# Altium PCB FxxZx.PcbDoc (part 1 of 2)
Units mil, origin at the board's own origin, x right, y up, seen from the top; angles counter-clockwise.
Board outline 1968 x 1968 mil, 4 copper layers (Top Layer, Gnd Layer, Vcc Layer, Bottom Layer), stack 30.635 mil thick; 55 components, 130 nets, 443 pads, 464 vias.
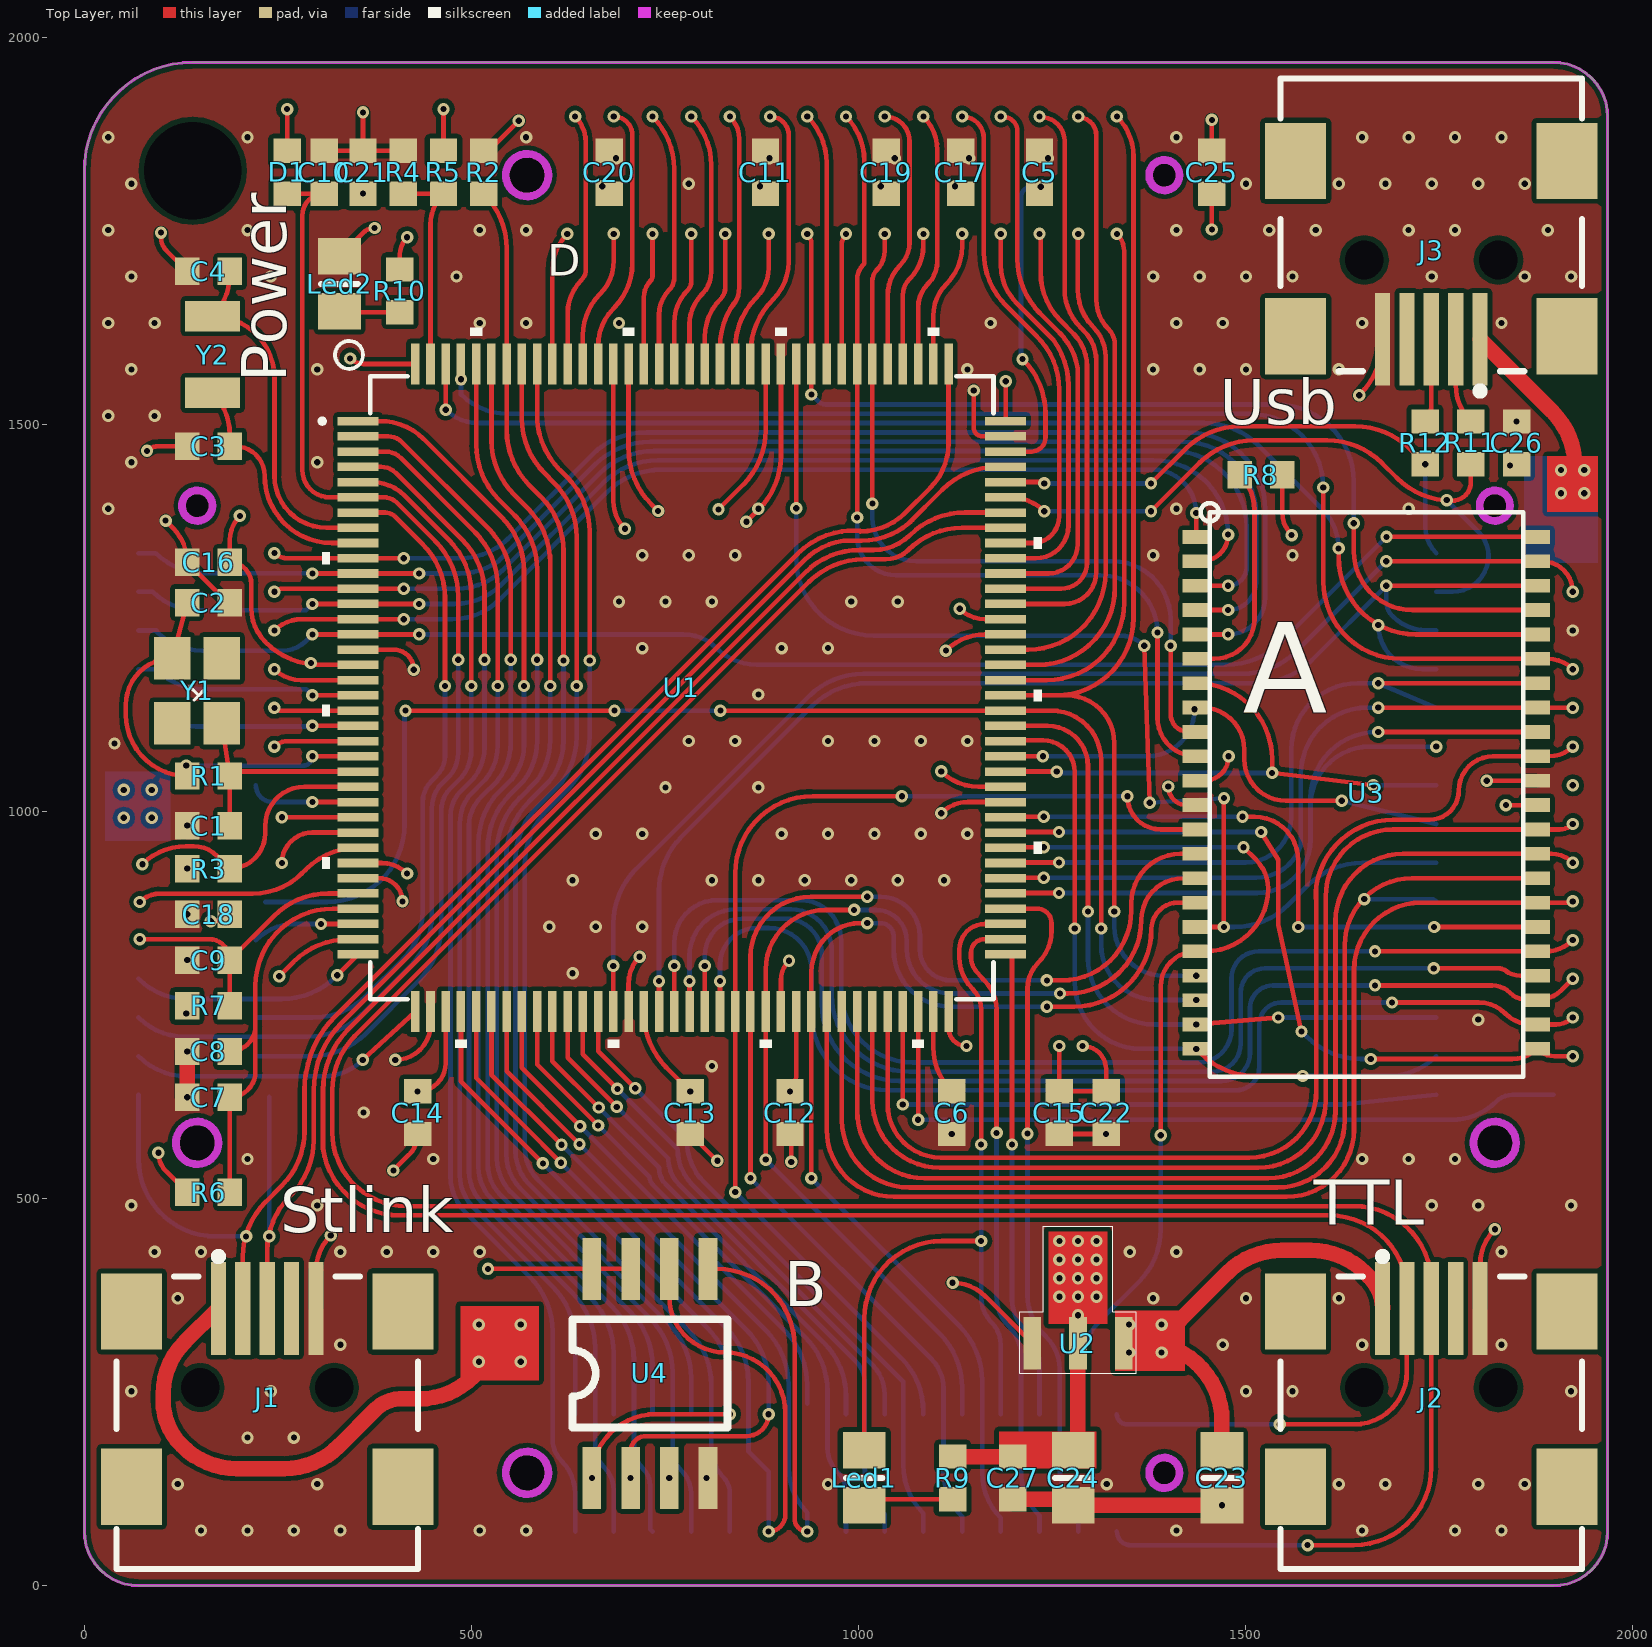
[diagram p0: Top Layer view]
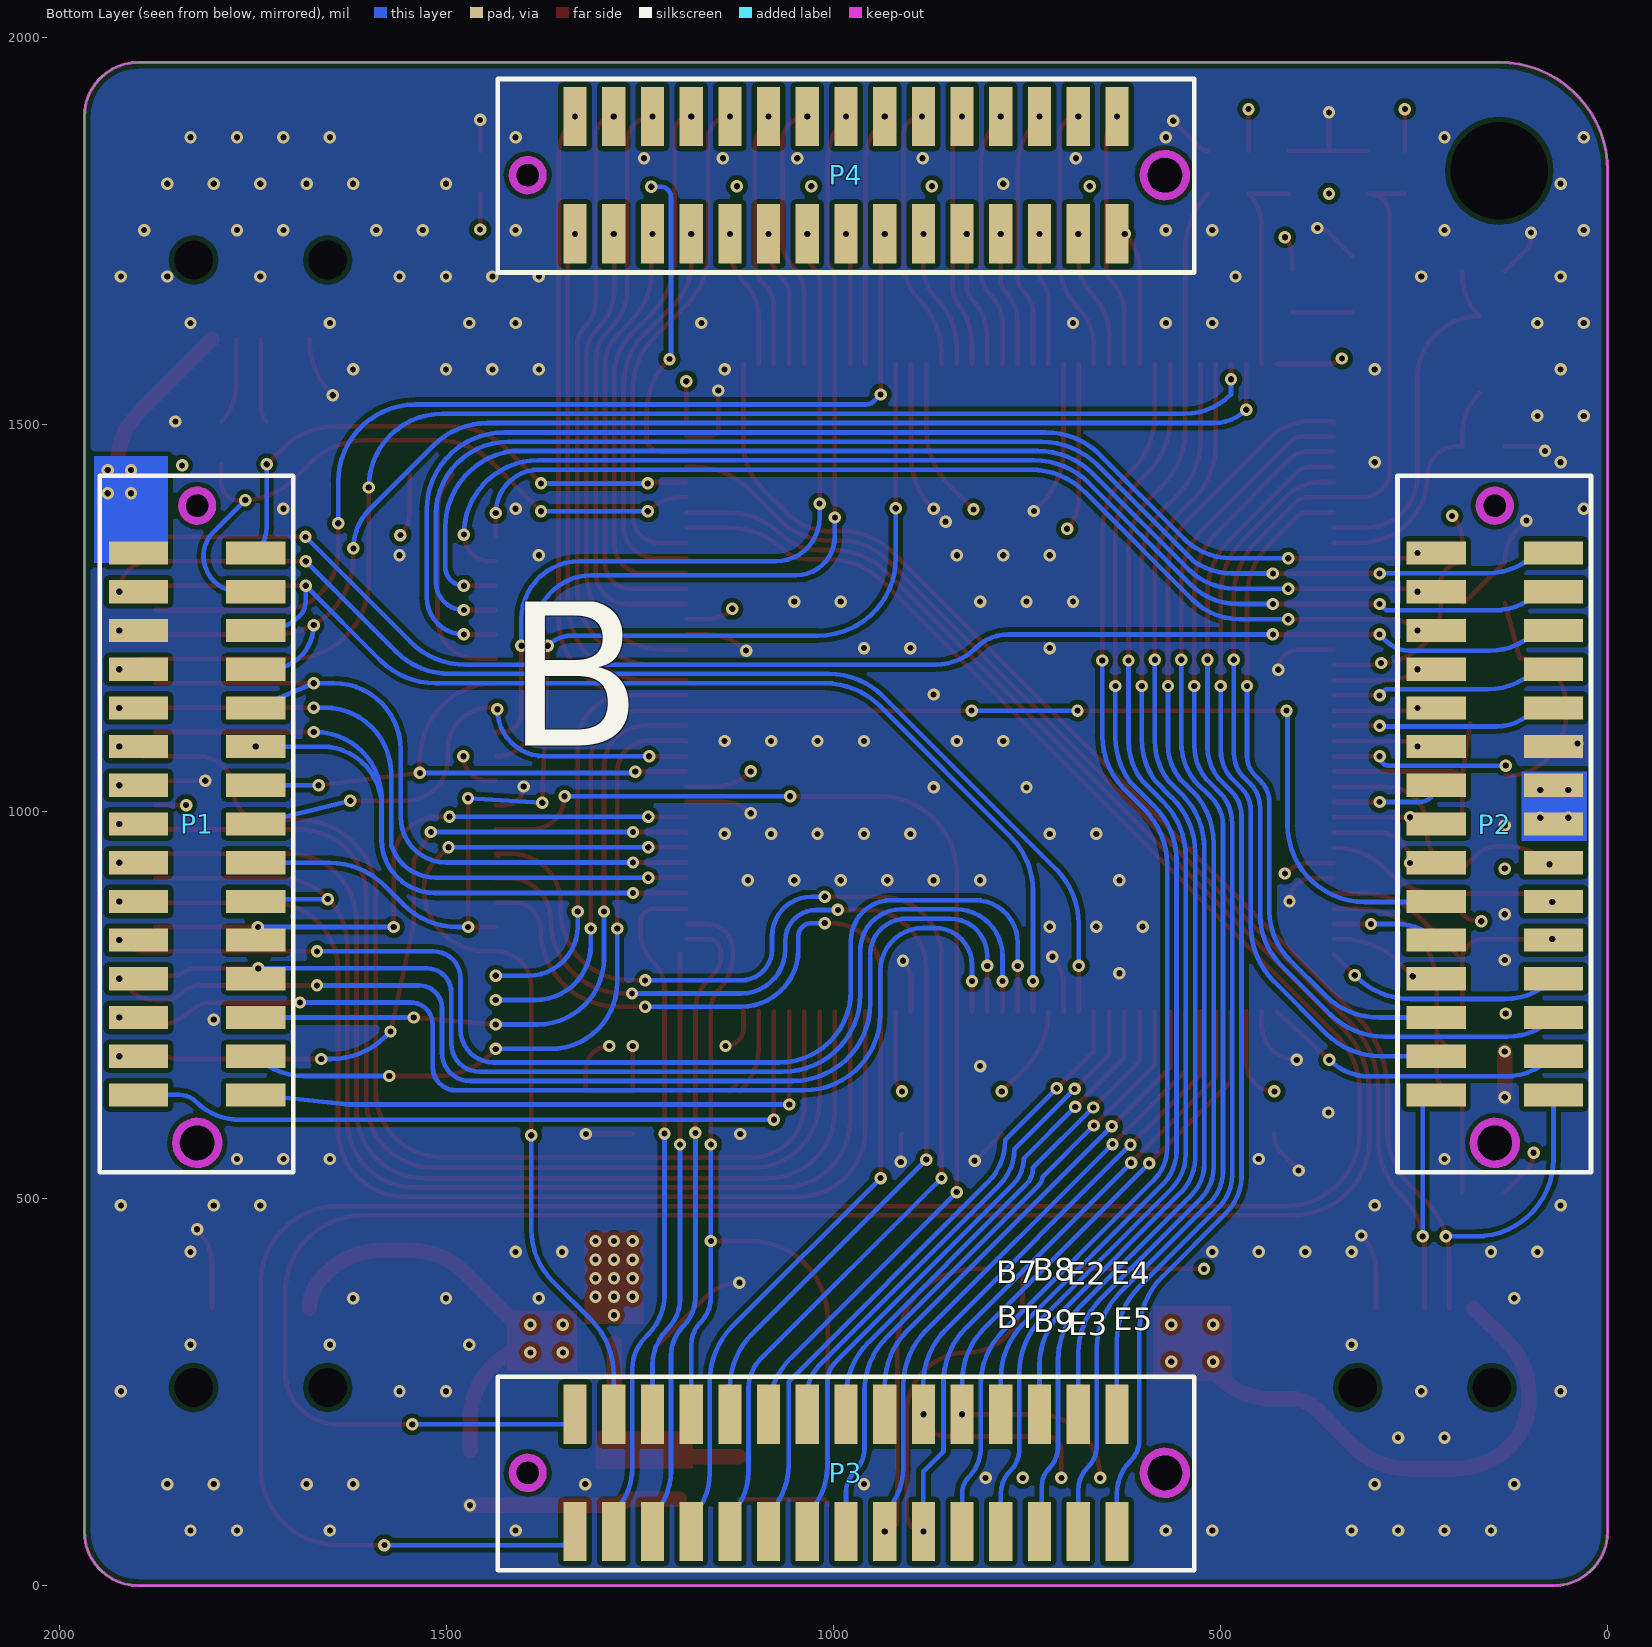
[diagram p1: Bottom Layer view, seen from below]
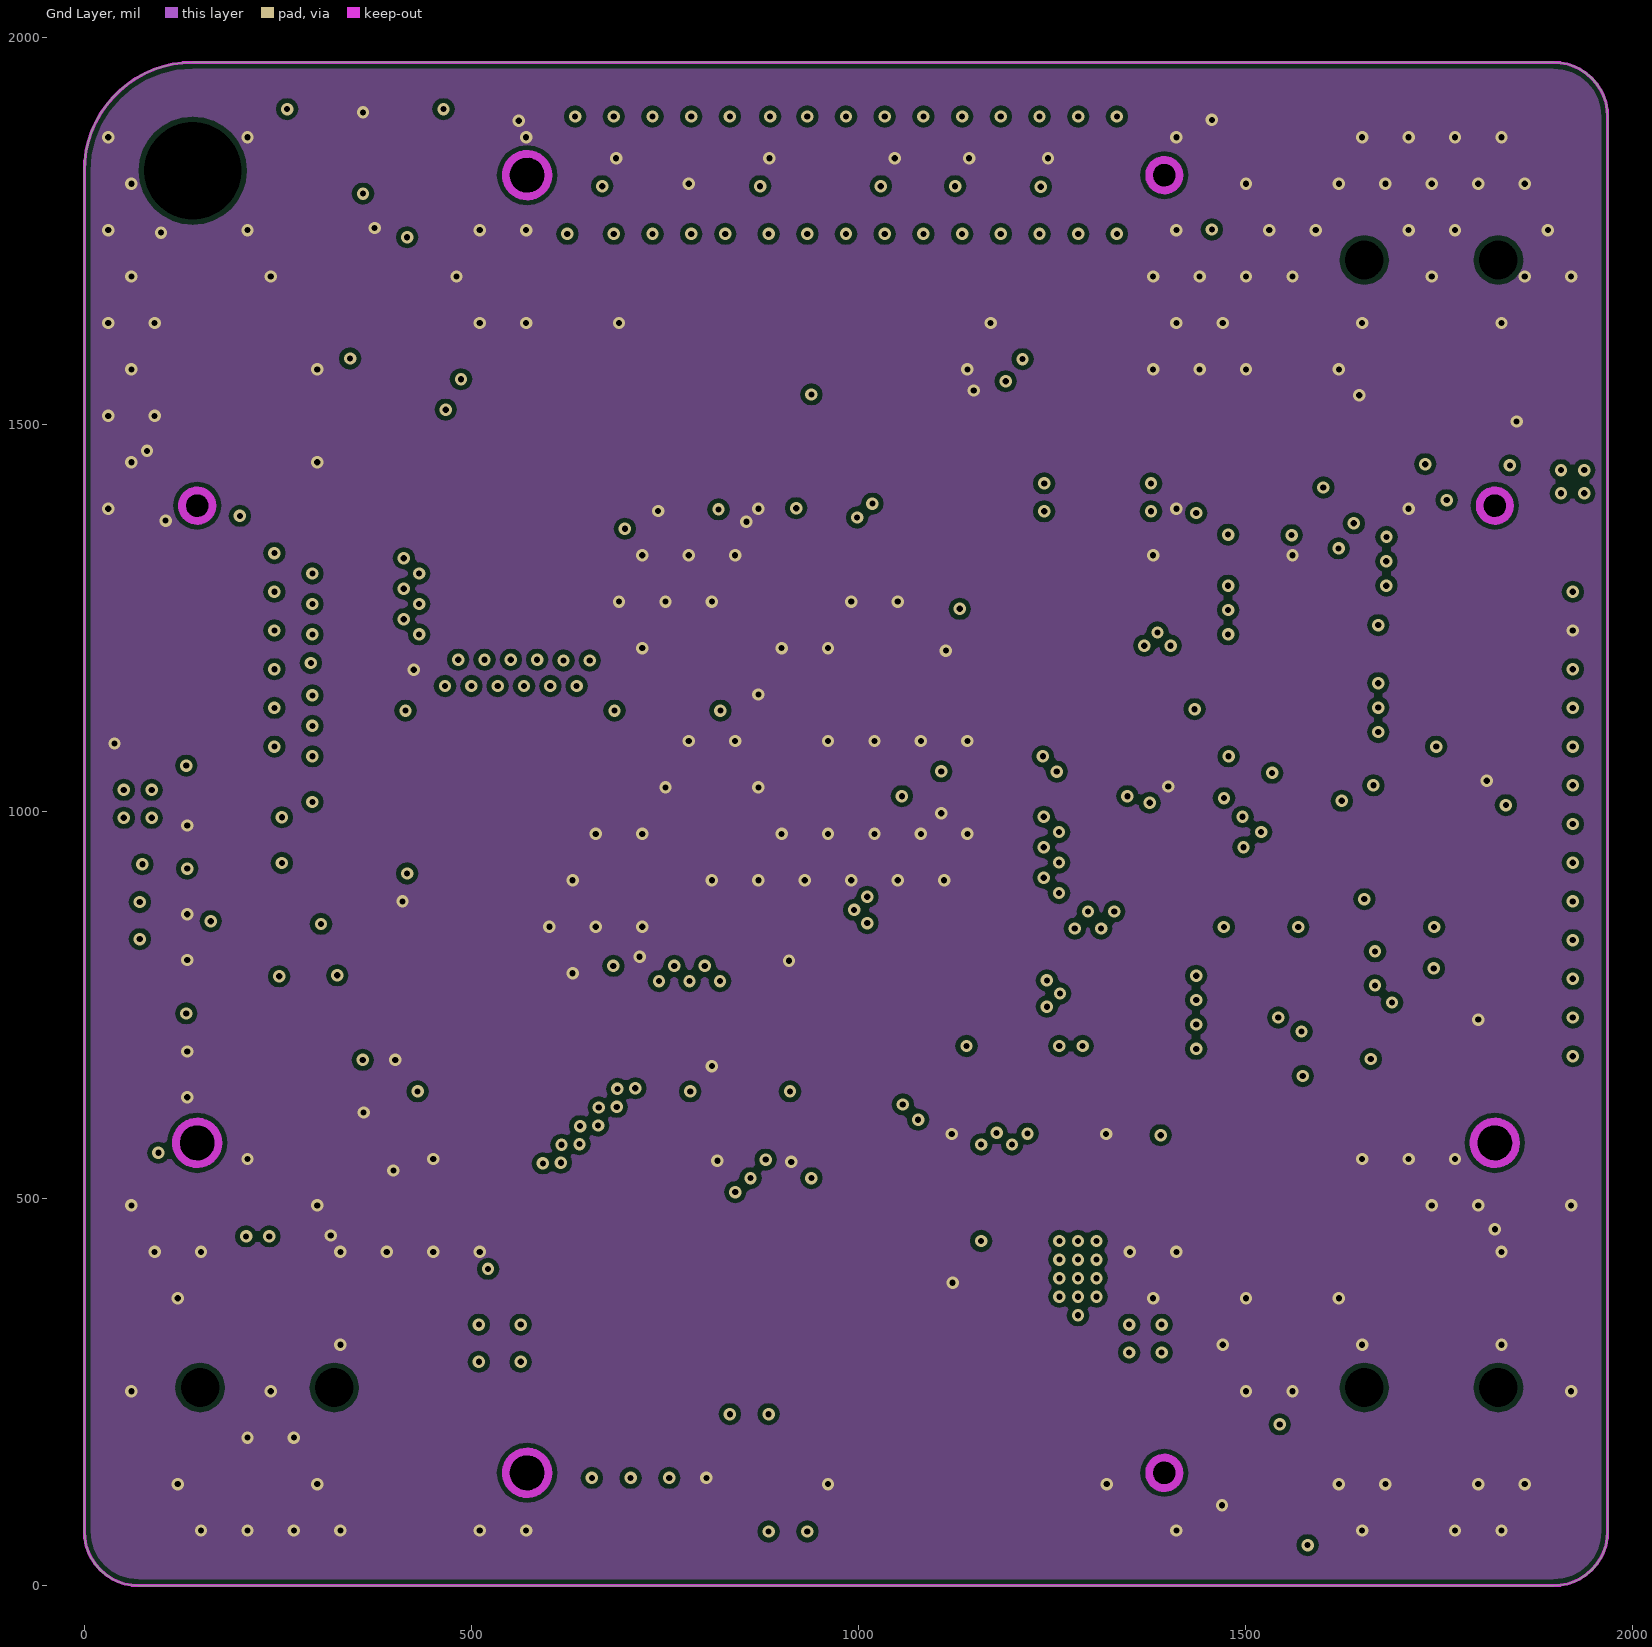
[diagram p2: Gnd Layer]
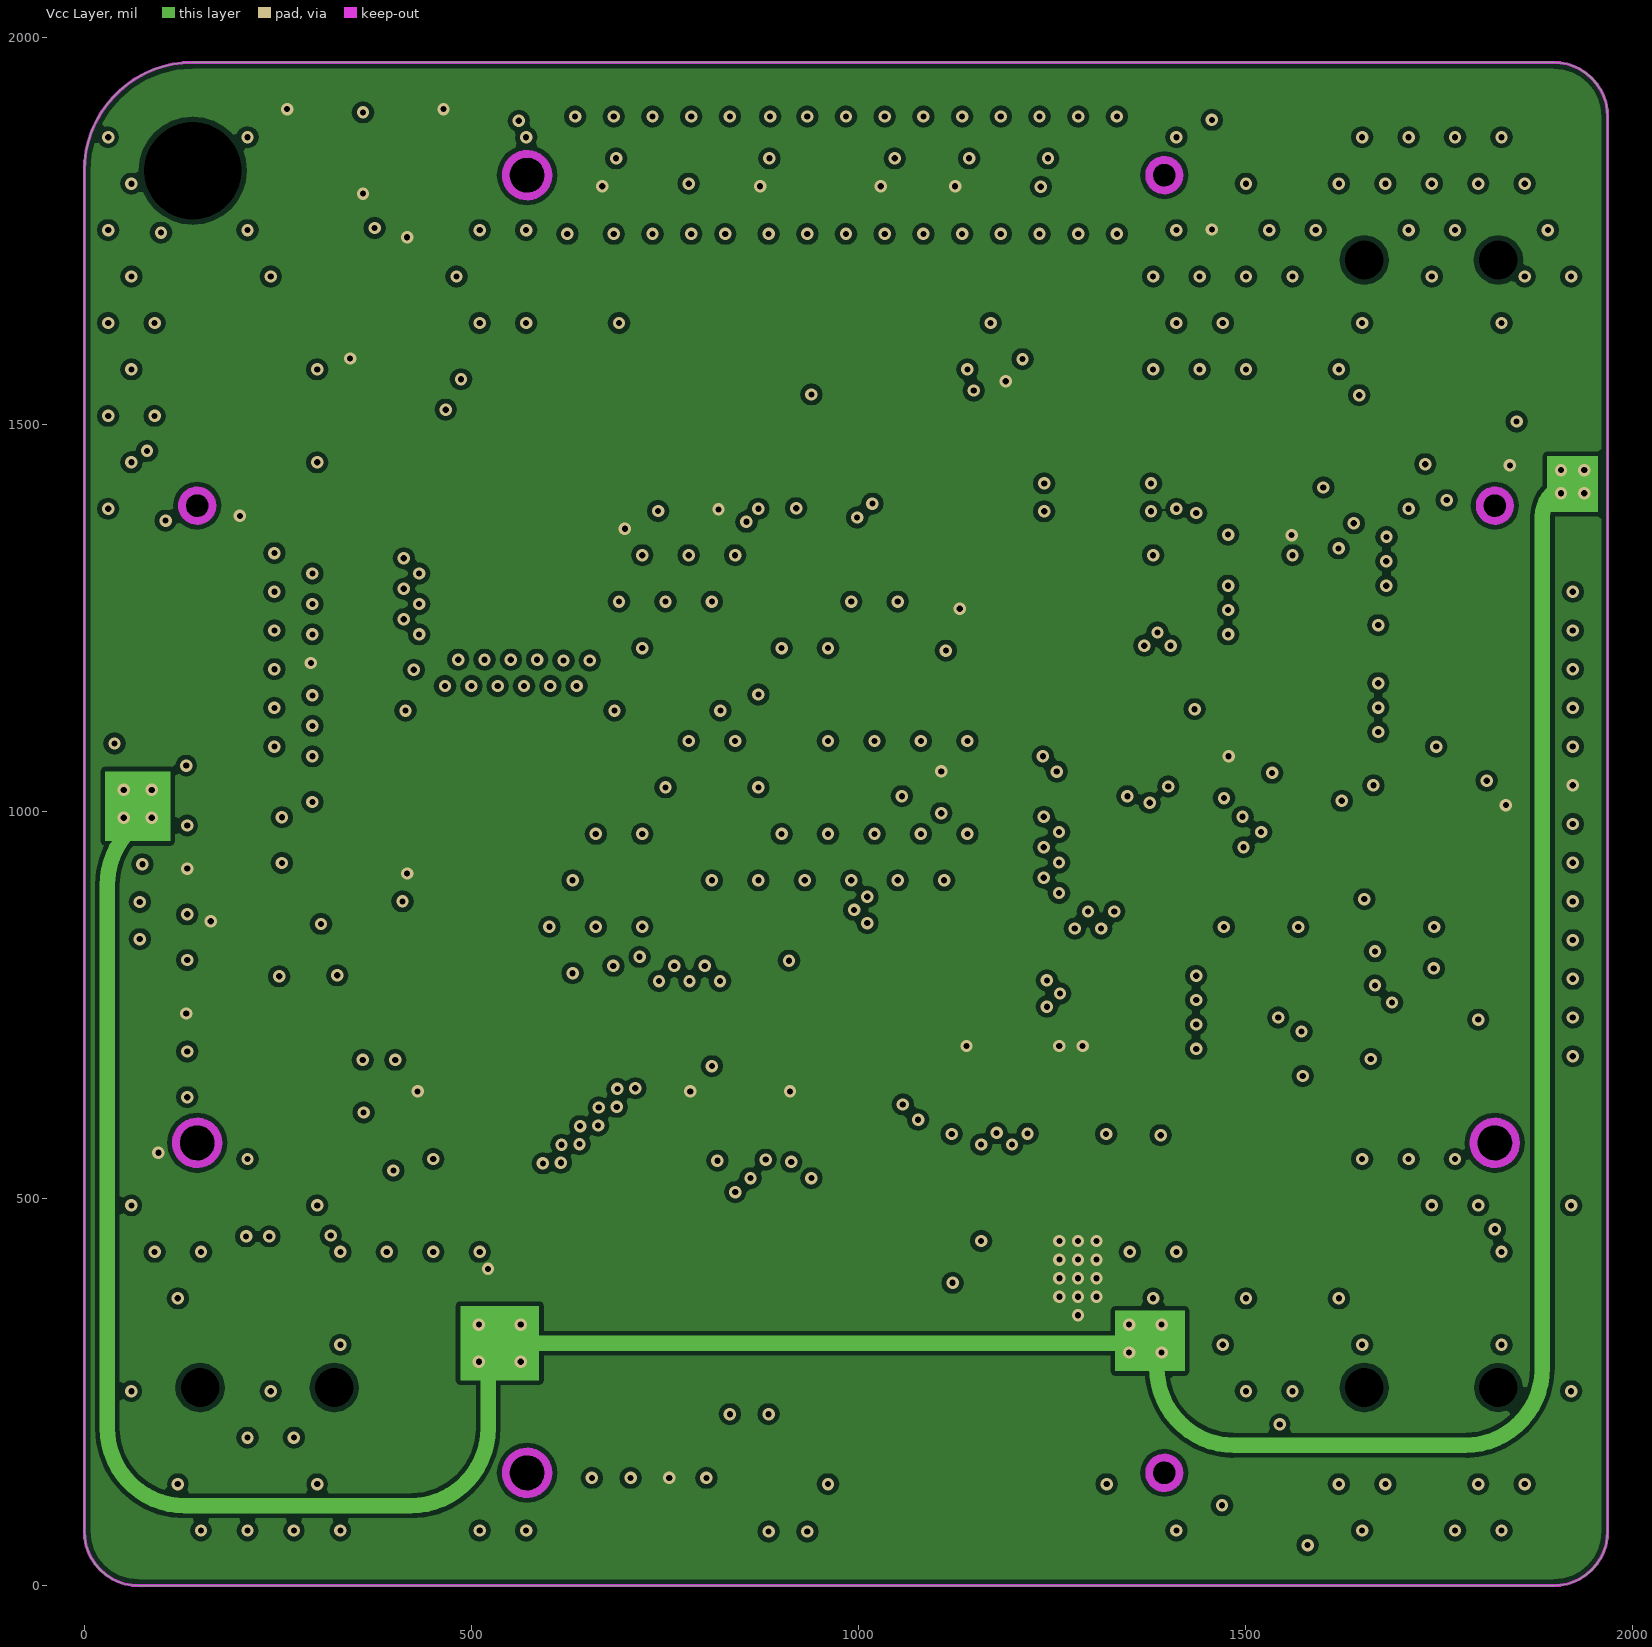
[diagram p3: Vcc Layer]

## Layer stack, top to bottom
Top Solder: solder mask 0.4, Solder Resist, Dk 3.5
Top Layer: signal copper 1.4
Dielectric 1: core 10, FR-4, Dk 4.2
Gnd Layer: signal copper 1.4173
Dielectric 2: prepreg 5, Dk 4.2
Vcc Layer: signal copper 1.4173
Dielectric 3: core 10, Dk 4.2
Bottom Layer: signal copper 1.4
Bottom Solder: solder mask 0.4, Solder Resist, Dk 3.5

## Board outline
0,70 ccw(c70,70) 70,0 1898,0 ccw(c1898,70) 1968,70 1968,1898 ccw(c1898,1898) 1898,1968 140,1968 ccw(c140,1828) 0,1828

## Design rules (kind name [scope] priority, off if disabled: settings)
Clearance [All] p1: gap=6 ignorepadtopadclearanceinfootprint=FALSE
HoleSize [All] p1: absolutevalues=TRUE maxlimit=99999 minlimit=8 maxpercent=80.000 minpercent=20.000
MinimumSolderMaskSliver [All] p1: minsoldermaskwidth=0
PolygonConnect [All] p1: connectstyle=Direct reliefconductorwidth=10 reliefentries=4 polygonreliefangle="90 Angle" airgapwidth=10
RoutingVias [All] p1: holewidth=8 width=16 viastyle="Through Hole" minholewidth=8 minwidth=16 maxholewidth=28 maxwidth=50
SilkToSilkClearance [All] p1: silktosilkclearance=0
SilkToSolderMaskClearance [IsPad] p1: minsilkscreentomaskgap=0 clearancetoexposedcopper=TRUE
SolderMaskExpansion [All] p1: expansion=4
Width [All] p1: maxlimit=10000 minlimit=6 preferedwidth=6
26 further rules are at their usual default settings.

## Components (designator, comment, footprint, x,y, rotation, side; value= is the part's Value field where it differs from the comment)
C1 "22p" 0603 160.44,982 r0 top
C2 "22p" 0603 160.44,1270 r180 top
C3 "15p" 0603 160.44,1472 r0 top
C4 "15p" 0603 160.44,1698 r0 top
C5 "2.2u" 0603 1234,1825.97 r270 top
C6 "2.2u" 0603 1120.52,611.05 r90 top
C7 "10u" 0603 160.44,631.07 r0 top
C8 "104" 0603 160.44,690.13 r0 top
C9 "104" 0603 160.44,808.24 r0 top
C10 "104" 0603 310,1826 r270 top
C11 "104" 0603 880,1825.97 r270 top
C12 "104" 0603 911.69,611.05 r90 top
C13 "104" 0603 782.73,611.05 r90 top
C14 "104" 0603 430.53,611.05 r90 top
C15 "104" 0603 1259.52,611.05 r90 top
C16 "104" 0603 160.44,1322 r0 top
C17 "104" 0603 1132,1825.97 r270 top
C18 "104" 0603 160.44,867.29 r0 top
C19 "104" 0603 1036,1825.97 r270 top
C20 "104" 0603 678,1825.98 r270 top
C21 "104" 0603 360,1826 r270 top
C22 "104" 0603 1320,611.05 r90 top
C23 "10u" 0805 1469.69,139.25 r90 top
C24 "10u" 0805 1277.69,139.25 r90 top
C25 "104" 0603 1456.69,1826 r270 top
C26 "104" 0603 1850.39,1476.38 r270 top
C27 "104" 0603 1199.69,139.25 r90 top
D1 "1N4148" 0603 262,1826 r270 top
J1 "MicroUSB" USB/SM0.8-6H5 236.22,49.21 r270 top
J2 "MicroUSB" USB/SM0.8-6H5 1740.16,49.21 r270 top
J3 "MicroUSB" USB/SM0.8-6H5 1740.16,1919.29 r90 top
Led1 "Red" 0805 1007.69,139.25 r90 top
Led2 "Red" 0805 329.69,1681.82 r90 top
P1 "XH1.27A" XH1.27A 1898,634 r180 bottom locked
P2 "XH1.27A" XH1.27A 221.6,634 r180 bottom locked
P3 "XH1.27A" XH1.27A 634,70 r90 bottom locked
P4 "XH1.27A" XH1.27A 634,1746.4 r90 bottom locked
R1 "1M" 0603 160.44,1046 r180 top
R2 "50k" 0603 516,1826 r270 top
R3 "10k" 0603 160.44,926.35 r0 top
R4 "0" 0603 412,1826 r270 top
R5 "0" 0603 464,1826 r270 top
R6 "10" 0603 160.44,508 r0 top
R7 "x" 0603 160.44,749.18 r180 top
R8 "10k" 0603 1520.13,1435.25 r0 top
R9 "1k" 0603 1121.69,139.25 r90 top
R10 "1k" 0603 407.69,1672.81 r90 top
R11 "10R" 0603 1791.34,1476.38 r270 top
R12 "10R" 0603 1732.28,1476.38 r270 top
U1 "STM32F4xxZ1" LQFP144-20x20mm 772,1160 r0 top locked value=Value
U2 "AMS1117" SOT-89 1283.69,279.2 r0 top
U3 "IS62WV51216" tsop-44 1453.81,657.64 r0 top locked
U4 "W25Q64" SOIC-8 655.69,139.25 r90 top
Y1 "25M" 3225-4 202.65,1085 r90 top
Y2 "32.768" 3215-2 165.65,1541 r90 top

## Footprints (in the part's own frame and the unit in brackets; to place one, negate y for a bottom-side part, rotate by r counter-clockwise, add the part's x,y. Pads: shape width x height; smd on the part's side, far side on the other; paste and mask are expansions set on the pad)
0603 [mm] "Chip Capacitor, Body 1.6x0.8mm, IPC High Density"
  rect 0.8x0.9 smd: 1(-0.7,0) 2(0.7,0)
  body extent -0.87,-0.48 0.87,0.48, height 1.3
0805 [mm] "Chip Resistor, Body 2.0x1.2mm, IPC Medium Density"
  rect 1.2x1.4 smd: 1(-0.9,0) 2(0.9,0)
  silkscreen extent 0,-0.6 0,0.6, body extent -1.07,-0.7 1.07,0.7, height 0.7
3215-2 [mm] "XTAL"
  rect 1x1.8 smd: 1(0,0) 2(2.515,0)
3225-4 [mm] "XTAL"
  rect 1.4x1.2 smd: 1(0.737,0.635) 2(2.87,0.635) 3(2.87,2.261) 4(0.737,2.261)
  silkscreen extent 1.5,1.24 1.96,1.7
LQFP144-20x20mm [mm]
  rect 1.346x0.28 smd: 1(-10.625,8.75) 2(-10.625,8.25) 3(-10.625,7.75) 4(-10.625,7.25) 5(-10.625,6.75) 6(-10.625,6.25) 7(-10.625,5.75) 8(-10.625,5.25) 9(-10.625,4.75) 10(-10.625,4.25) 11(-10.625,3.75) 12(-10.625,3.25) 13(-10.625,2.75) 14(-10.625,2.25) 15(-10.625,1.75) 16(-10.625,1.25) 17(-10.625,0.75) 18(-10.625,0.25) 19(-10.625,-0.25) 20(-10.625,-0.75) 21(-10.625,-1.25) 22(-10.625,-1.75) 23(-10.625,-2.25) 24(-10.625,-2.75) 25(-10.625,-3.25) 26(-10.625,-3.75) 27(-10.625,-4.25) 28(-10.625,-4.75) 29(-10.625,-5.25) 30(-10.625,-5.75) 31(-10.625,-6.25) 32(-10.625,-6.75) 33(-10.625,-7.25) 34(-10.625,-7.75) 35(-10.625,-8.25) 36(-10.625,-8.75) 73(10.625,-8.75) 74(10.625,-8.25) 75(10.625,-7.75) 76(10.625,-7.25) 77(10.625,-6.75) 78(10.625,-6.25) 79(10.625,-5.75) 80(10.625,-5.25) 81(10.625,-4.75) 82(10.625,-4.25) 83(10.625,-3.75) 84(10.625,-3.25) 85(10.625,-2.75) 86(10.625,-2.25) 87(10.625,-1.75) 88(10.625,-1.25) 89(10.625,-0.75) 90(10.625,-0.25) 91(10.625,0.25) 92(10.625,0.75) 93(10.625,1.25) 94(10.625,1.75) 95(10.625,2.25) 96(10.625,2.75) 97(10.625,3.25) 98(10.625,3.75) 99(10.625,4.25) 100(10.625,4.75) 101(10.625,5.25) 102(10.625,5.75) 103(10.625,6.25) 104(10.625,6.75) 105(10.625,7.25) 106(10.625,7.75) 107(10.625,8.25) 108(10.625,8.75)
  rect 0.28x1.346 smd: 37(-8.75,-10.625) 38(-8.25,-10.625) 39(-7.75,-10.625) 40(-7.25,-10.625) 41(-6.75,-10.625) 42(-6.25,-10.625) 43(-5.75,-10.625) 44(-5.25,-10.625) 45(-4.75,-10.625) 46(-4.25,-10.625) 47(-3.75,-10.625) 48(-3.25,-10.625) 49(-2.75,-10.625) 50(-2.25,-10.625) 51(-1.75,-10.625) 52(-1.25,-10.625) 53(-0.75,-10.625) 54(-0.25,-10.625) 55(0.25,-10.625) 56(0.75,-10.625) 57(1.25,-10.625) 58(1.75,-10.625) 59(2.25,-10.625) 60(2.75,-10.625) 61(3.25,-10.625) 62(3.75,-10.625) 63(4.25,-10.625) 64(4.75,-10.625) 65(5.25,-10.625) 66(5.75,-10.625) 67(6.25,-10.625) 68(6.75,-10.625) 69(7.25,-10.625) 70(7.75,-10.625) 71(8.25,-10.625) 72(8.75,-10.625) 109(8.75,10.625) 110(8.25,10.625) 111(7.75,10.625) 112(7.25,10.625) 113(6.75,10.625) 114(6.25,10.625) 115(5.75,10.625) 116(5.25,10.625) 117(4.75,10.625) 118(4.25,10.625) 119(3.75,10.625) 120(3.25,10.625) 121(2.75,10.625) 122(2.25,10.625) 123(1.75,10.625) 124(1.25,10.625) 125(0.75,10.625) 126(0.25,10.625) 127(-0.25,10.625) 128(-0.75,10.625) 129(-1.25,10.625) 130(-1.75,10.625) 131(-2.25,10.625) 132(-2.75,10.625) 133(-3.25,10.625) 134(-3.75,10.625) 135(-4.25,10.625) 136(-4.75,10.625) 137(-5.25,10.625) 138(-5.75,10.625) 139(-6.25,10.625) 140(-6.75,10.625) 141(-7.25,10.625) 142(-7.75,10.625) 143(-8.25,10.625) 144(-8.75,10.625)
  silkscreen extent -11.88,-11.81 11.81,11.81, body extent -10.95,-10.95 10.95,10.95, height 1.6
SOIC-8 [mil]
  rect 80x24 smd: 1(0,0) 2(0,-50.06) 3(0,-100.06) 4(0,-150.06) 5(270,-150) 6(270,-100) 7(270,-50) 8(270,0)
  silkscreen extent 65,-175 205,25
SOT-89 [mm]
  rect 0.58x1.73 smd: 1(-1.5,0.865) 2(0,0.865) 3(1.5,0.865)
  Top Layer region: -0.967,1.5 0.967,1.5 0.967,4.53 -0.967,4.53
  silkscreen extent -1.91,-0.13 1.91,4.7
tsop-44 [mm]
  rect 0.885x0.45 smd: 1(-0.443,17.71) 2(-0.443,16.91) 3(-0.443,16.11) 4(-0.443,15.31) 5(-0.443,14.51) 6(-0.443,13.71) 7(-0.443,12.91) 8(-0.443,12.11) 9(-0.443,11.31) 10(-0.443,10.51) 11(-0.443,9.71) 12(-0.443,8.91) 13(-0.443,8.11) 14(-0.443,7.31) 15(-0.443,6.51) 16(-0.443,5.71) 17(-0.443,4.91) 18(-0.443,4.11) 19(-0.443,3.31) 20(-0.443,2.51) 21(-0.443,1.71) 22(-0.443,0.91) 23(10.733,0.91) 24(10.733,1.71) 25(10.733,2.51) 26(10.733,3.31) 27(10.733,4.11) 28(10.733,4.91) 29(10.733,5.71) 30(10.733,6.51) 31(10.733,7.31) 32(10.733,8.11) 33(10.733,8.91) 34(10.733,9.71) 35(10.733,10.51) 36(10.733,11.31) 37(10.733,12.11) 38(10.733,12.91) 39(10.733,13.71) 40(10.733,14.51) 41(10.733,15.31) 42(10.733,16.11) 43(10.733,16.91) 44(10.733,17.71)
  silkscreen extent -0.3,0 10.29,18.82
USB/SM0.8-6H5 [mm]
  rect 3.048x0.5 smd: 1(-7.85,-1.6) 2(-7.85,-0.8) 3(-7.85,0) 4(-7.85,0.8) 5(-7.85,1.6)
  round 0.6 hole 1.27 unplated: MH1(-5.25,2.2) MH2(-5.25,-2.2)
  rect 2.5x2 smd: ""(-7.75,4.45) ""(-7.75,-4.45) ""(-1.996,4.45) ""(-1.996,-4.45)
  silkscreen extent -9.67,-4.95 0.7,4.95
XH1.27A [mm]
  rect 1.95x0.76 smd: 1(0,17.78) 2(0,16.51) 3(0,15.24) 4(0,13.97) 5(0,12.7) 6(0,11.43) 7(0,10.16) 8(0,8.89) 9(0,7.62) 10(0,6.35) 11(0,5.08) 12(0,3.81) 13(0,2.54) 14(0,1.27) 15(0,0) 16(3.85,0) 17(3.85,1.27) 18(3.85,2.54) 19(3.85,3.81) 20(3.85,5.08) 21(3.85,6.35) 22(3.85,7.62) 23(3.85,8.89) 24(3.85,10.16) 25(3.85,11.43) 26(3.85,12.7) 27(3.85,13.97) 28(3.85,15.24) 29(3.85,16.51) 30(3.85,17.78)
  Keep-Out Layer circle w0.254: c1.925,19.335 r0.5
  Keep-Out Layer circle w0.254: c1.925,-1.575 r0.7
  Keep-Out Layer board cut-out: 1.225,-1.575 1.278,-1.843 1.43,-2.07 1.657,-2.222 1.925,-2.275 1.925,-2.275 2.193,-2.222 2.42,-2.07 2.572,-1.843 2.625,-1.575 2.625,-1.575 2.572,-1.307 2.42,-1.08 2.193,-0.928 1.925,-0.875 1.925,-0.875 1.657,-0.928 1.43,-1.08 1.278,-1.307 1.225,-1.575
  Keep-Out Layer board cut-out: 1.925,18.835 1.734,18.873 1.571,18.981 1.463,19.144 1.425,19.335 1.425,19.335 1.463,19.526 1.571,19.689 1.734,19.797 1.925,19.835 1.925,19.835 2.116,19.797 2.279,19.689 2.387,19.526 2.425,19.335 2.425,19.335 2.387,19.144 2.279,18.981 2.116,18.873 1.925,18.835
  silkscreen extent -1.27,-2.54 5.08,20.32

## Part data
C1 C2 C3 C4 C5 C6 C7 C8 C9 C10 C11 C12 C13 C14 C15 C16 C17 C18 C19 C20 C21 C22 C23 C24 C25 C26 C27: library part C, "Capacitor", LatestRevisionDate=17-Jul-2002, LatestRevisionNote="Re-released for DXP Platform.", PackageDescription="Radial Cap, Thru-Hole; 2 Leads; 0.3 in Pin Spacing", PackageReference=RAD-0.3, Published=8-Jun-2000, Publisher="Altium Limited"
D1: library part D, "Diode", Code_JEDEC=DO-214-AB, LatestRevisionDate=17-Jul-2002, LatestRevisionNote="Re-released for DXP Platform.", PackageDescription="DO-214-AB/SMC; 2 C-Bend Leads; Body 7.9 x 5.9 mm, inc. leads (LxW)", PackageReference=SMC, PackageVersion=Sep-1996, Published=8-Jun-2000, Publisher="Altium Limited"
Led1 Led2: library part LED, "LED", LatestRevisionDate=08-Jul-2005, LatestRevisionNote="Mech Layer 1 removed.", PackageDescription="LED; 2 Leads", PackageReference=LED-0, Published=8-Jun-2000, Publisher="Altium Limited"
R1 R2 R3 R4 R5 R6 R7 R8 R9 R10 R11 R12: library part R, "Resistor", LatestRevisionDate=17-Jul-2002, LatestRevisionNote="Re-released for DXP Platform.", PackageDescription="Axial Device, Thru-Hole; 2 Leads; 0.4 in Pin Spacing", PackageReference=AXIAL-0.4, Published=8-Jun-2000, Publisher="Altium Limited"
U1: "Imported", Manufacturer_Part_Number=stm32f4xxz1, C="Copyright (C) 2016 Accelerated Designs. All rights reserved", Copyright="Copyright (C) 2016 Accelerated Designs. All rights reserved", RefDes=RefDes, Type=Type, Vendor=STMicroelectronics
U4: library part W25X16, "W25X16;SST25VF016;MX25L1605"
Y1 Y2: library part XTAL, "Crystal Oscillator", LatestRevisionDate=17-Jul-2002, LatestRevisionNote="Re-released for DXP Platform.", Published=8-Jun-2000, Publisher="Altium Limited"

## Free pads (board coordinates)
  round 3.2 hole 125.98: 19(140,1828)

## Via types
v1: diameter 16, hole 8, Top Layer to Bottom Layer, 464 vias

## Nets (pads, with @x,y where several pads share a name; then routed paths per layer and width w, separated by ;. In a path a pad name is that pad's centre, name@x,y a point inside that pad or via, vN(x,y) a via of type N, cw(c..) or ccw(c..) an arc to the next point about the centre after c; other vN are vias at no path point)
A0: P2.11 U1.34 | length 137.7
  Top Layer w6: v1(305.69,854.88) U1.34@353.69,854.88
  Bottom Layer w6: P2.11@221.6,834 cw(c272.01,783.59) 272.01,854.88 v1(305.69,854.88)
A1: P2.12 U1.35 | length 117.6
  Top Layer w6: v1(251.69,787.25) 270.35,805.91 cw(c341.06,735.2) 341.06,835.2 U1.35@353.69,835.2
A2: P2.19 U1.36 | length 310.2
  Top Layer w6: v1(326.7,788.51) U1.36@353.69,815.51
  Bottom Layer w6: P2.19@70.03,784 ccw(c132.89,846.86) 132.89,757.96 254.72,757.96 ccw(c254.72,857.96) 325.43,787.25 v1(326.7,788.51)
A3: P2.17 U1.37 | length 394.5
  Top Layer w6: v1(359.69,679.25) U1.37@427.51,741.69
  Bottom Layer w6: P2.17@70.03,684 ccw(c132.89,746.86) 132.89,657.96 308.29,657.96 ccw(c308.29,730.65) v1(359.69,679.25)
A4: P3.20 U1.40 U4.1 | length 885
  Top Layer w6: U1.40@486.57,741.69 486.57,651.48 555.54,582.51 v1(592.46,545.59) ; v1(655.69,139.25) cw(c738.02,139.25) 738.02,221.57 v1(834,221.57)
  Bottom Layer w6: v1(592.46,545.59) 804.71,333.34 cw(c734,262.63) 834,262.63 v1(834,221.57)
A5: P3.10 U1.41 U4.6 | length 1261.1
  Top Layer w6: U1.41@506.25,741.69 506.25,655.84 567.57,594.53 v1(615.65,546.44) ; U4.6@755.69,409.25 755.69,373.25 ccw(c827.69,373.25) 827.69,301.25 cw(c827.69,223.25) 905.69,223.25 905.69,91.69 cw(c884,91.69) v1(884,70)
  Bottom Layer w6: v1(615.65,546.44) 828.67,333.42 cw(c757.96,262.71) 857.96,262.71 857.96,173.46 884,147.43 v1(884,70)
A6: P3.21 U1.42 U4.2 | length 904
  Top Layer w6: U1.42@525.94,741.69 525.94,660.2 v1(616.5,569.63) ; v1(705.76,139.25) 705.76,173.32 cw(c725.69,173.32) 725.69,193.25 855.68,193.25 ccw(c855.68,221.57) v1(884,221.57)
  Bottom Layer w6: v1(616.5,569.63) 854.71,331.42 cw(c784,260.71) 884,260.71 v1(884,221.57)
A7: P3.9 U1.43 U4.5 | length 1242.4
  Top Layer w6: U1.43@545.62,741.69 545.62,664.55 v1(639.69,570.48) ; U4.5@805.69,409.25 817.69,409.25 cw(c817.69,309.25) 917.69,309.25 917.69,86.31 ccw(c934,86.31) v1(934,70)
  Bottom Layer w6: v1(639.69,570.48) 880.75,329.43 cw(c810.04,258.71) 910.04,258.71 910.04,152.26 ccw(c991.85,152.26) 934,94.42 v1(934,70)
A8: P4.26 U1.100 | length 653.3
  Top Layer w6: v1(1134,1897.97) cw(c1134,1869.97) 1162,1869.97 1162,1722.58 ccw(c1258.65,1722.58) 1190.31,1654.24 1231.22,1613.33 ; U1.100@1190.31,1347.01 1225.02,1347.01 ccw(c1225.02,1381.36) 1259.38,1381.36 1259.38,1545.35 ccw(c1163.24,1545.35) 1231.26,1613.29 ; 1231.26,1613.29 ccw(c1163.24,1545.35) 1231.22,1613.33
A9: J2.3 P3.1 U1.101 | length 3477.2
  Top Layer w6: 1064.46,1337.97 cw(c1035.44,1367.06) 1035.44,1325.97 1006.71,1325.97 ccw(c1006.71,1225.97) 936,1296.68 349.67,710.35 ccw(c420.38,639.64) 320.38,639.64 320.38,585.97 ccw(c415.99,585.97) 415.99,490.36 1640.16,490.36 cw(c1640.16,390.36) 1740.16,390.36 J2.3@1740.16,358.27 1740.16,152.36 cw(c1640.16,152.36) 1640.16,52.36 v1(1580.38,52.36) ; 1064.49,1338.01 cw(c1133.8,1268.63) 1133.8,1366.69 U1.101@1190.31,1366.69
  Bottom Layer w6: P3.1@1334,70 ccw(c1351.64,70) 1351.64,52.36 v1(1580.38,52.36)
A10: J2.2 P3.30 U1.102 | length 3304.2
  Top Layer w6: 308.05,566.86 ccw(c407.39,578.36) 308.38,564.33 ; 1066.47,1357.22 cw(c1020,1403.7) 1020,1337.97 1001.74,1337.97 ccw(c1001.74,1237.97) 931.03,1308.68 341.18,718.83 ccw(c420.38,639.64) 308.38,639.64 308.38,564.34 ; 1066.61,1357.09 cw(c1137.32,1286.38) 1137.32,1386.38 U1.102@1190.31,1386.38 ; v1(1544.38,208.36) 1640.38,208.36 ccw(c1640.38,276.64) 1708.66,276.64 J2.2@1708.66,358.27 1708.66,378.36 ccw(c1608.66,378.36) 1608.66,478.36 407.39,478.36 cw(c407.39,578.36) 308.38,564.33
  Bottom Layer w6: P3.30@1334,221.57 ccw(c1347.21,221.57) 1347.21,208.36 v1(1544.38,208.36)
A11: P1.29 R11.2 U1.103 | length 886
  Top Layer w6: U1.103@1190.31,1406.06 1196.33,1406.06 cw(c1196.33,1344.31) v1(1240,1387.97) ; v1(1378,1387.97) 1440.43,1450.4 cw(c1511.14,1379.69) 1511.14,1479.69 1605.7,1479.69 cw(c1605.7,1379.69) 1676.41,1450.4 1695.83,1430.98 ccw(c1766.54,1501.69) v1@1766.54,1401.69 ; v1@1767.12,1401.69 ccw(c1767.12,1425.91) 1791.34,1425.91 R11.2@1791.34,1448.82
  Bottom Layer w6: v1(1240,1387.97) v1(1378,1387.97) ; P1.29@1746.43,1284 1767.61,1284 ccw(c1767.61,1330.43) 1814.05,1330.43 ccw(c1770.59,1330.43) 1801.32,1361.16 v1(1760.05,1402.43)
A12: P1.30 R12.2 U1.104 | length 703.2
  Top Layer w6: U1.104@1190.31,1425.75 1235.72,1425.75 cw(c1235.72,1419.69) v1(1240,1423.97) ; v1(1378,1423.97) 1422.43,1468.4 cw(c1493.14,1397.69) 1493.14,1497.69 1641.99,1497.69 cw(c1641.99,1397.69) 1712.7,1468.4 v1(1732.28,1448.82)
  Bottom Layer w6: v1(1240,1423.97) v1(1378,1423.97) ; v1(1732.28,1448.82) 1732.28,1368.14 ccw(c1780.57,1368.14) P1.30@1746.43,1334
A15: P4.5 U1.110 | length 178
  Top Layer w6: U1.110@1096.8,1578.31 1096.8,1640.46 cw(c1155.52,1640.46) 1114,1681.97 ccw(c1065.72,1730.26) 1134,1730.26 v1(1134,1746.4)
B0: P3.23 U1.46 | length 671.6
  Top Layer w6: U1.46@604.68,741.69 604.68,677.62 v1(664.59,617.71)
  Bottom Layer w6: v1(664.59,617.71) 742.48,539.82 ccw(c773.57,539.82) 751.58,517.84 954.71,314.71 cw(c884,244) 984,244 P3.23@984,221.57
B1: P3.7 U1.47 | length 836.9
  Top Layer w6: U1.47@624.36,741.69 624.36,681.98 649.65,656.69 v1(687.77,618.57)
  Bottom Layer w6: v1(687.77,618.57) 754.48,551.86 754.48,548.92 ; 754.39,551.86 ccw(c802.19,551.86) 754.48,548.92 ; P3.7@1034,70 1034,92.42 cw(c1096.86,155.28) 1007.96,155.28 1007.96,263.42 ccw(c971.56,263.42) 997.3,289.15 768.39,518.06 cw(c802.19,551.86) 754.48,548.92
B2: P3.24 U1.48 | length 676.5
  Top Layer w6: U1.48@644.05,741.69 644.05,686.34 v1(688.63,641.76)
  Bottom Layer w6: v1(688.63,641.76) 766.48,563.9 ccw(c831.57,563.9) 785.51,517.91 ; 785.54,517.88 1018.01,285.42 ; 1018.04,285.39 cw(c979.4,246.81) 1034,246.81 P3.24@1034,221.57
B3: P4.14 U1.133 | length 178.8
  Top Layer w6: U1.133@644.05,1578.31 644.05,1615.4 cw(c719,1615.4) 666,1668.4 ccw(c622.54,1711.86) 684,1711.86 v1(684,1746.4)
B4: P4.16 U1.134 | length 329.7
  Top Layer w6: U1.134@624.36,1578.31 624.36,1643.82 cw(c684.58,1643.82) 642,1686.4 ccw(c627.51,1700.89) 648,1700.89 648,1864.18 ccw(c600.2,1864.18) v1(634,1897.97)
B5: P4.15 U1.135 | length 173.3
  Top Layer w6: U1.135@604.68,1578.31 604.68,1699.75 cw(c670.65,1699.75) v1(624,1746.4)
B6: P3.11 U1.136 | length 1653.4
  Top Layer w6: U1.136@584.99,1578.31 584.99,1512.15 ccw(c684.99,1512.15) 585.97,1498.18 ccw(c684.99,1512.15) 614.28,1441.44 623.7,1432.02 cw(c552.99,1361.31) 652.99,1361.31 v1(652.99,1195.25)
  Bottom Layer w6: v1(652.99,1195.25) 652.99,1098.67 cw(c552.99,1098.67) 625.02,1029.3 598.28,1002.54 ccw(c668.99,931.83) 568.99,931.83 568.99,566.42 ccw(c629.75,566.42) 586.79,523.46 780.75,329.49 cw(c710.04,258.78) 810.04,258.78 810.04,177.28 ccw(c862.17,177.28) 810.14,174.09 ccw(c862.17,177.28) 825.31,140.42 cw(c804.32,119.43) 834,119.43 P3.11@834,70
B7: P3.19 U1.137 | length 1489.2
  Top Layer w6: U1.137@565.31,1578.31 565.31,1507.84 ccw(c665.31,1507.84) 594.6,1437.13 606.7,1425.02 cw(c535.99,1354.31) 635.99,1354.31 v1(635.99,1162.25)
  Bottom Layer w6: 616.08,1037.32 ccw(c537.03,1096.85) 616.17,1037.43 ; v1(635.99,1162.25) 635.99,1096.85 cw(c537.03,1096.85) 616.17,1037.43 ; P3.19@784,221.57 784,267.85 ccw(c684,267.85) 754.71,338.56 574.86,518.42 cw(c617.98,561.54) 556.99,561.54 556.99,936.83 cw(c656.99,936.83) 586.28,1007.54 616.17,1037.43
B8: P3.18 U1.139 | length 1476.8
  Top Layer w6: U1.139@525.94,1578.31 525.94,1480.21 ccw(c625.94,1480.21) 555.23,1409.5 572.7,1392.02 cw(c501.99,1321.31) 601.99,1321.31 v1(601.99,1162.25)
  Bottom Layer w6: 551.31,508.03 704.71,354.62 cw(c634,283.91) 734,283.91 P3.18@734,221.57 ; 551.28,508.05 cw(c595.52,552.24) 532.99,552.24 532.99,946.83 cw(c632.99,946.83) 562.28,1017.54 584.52,1039.78 ; 584.44,1039.67 ccw(c512.76,1092.81) 584.52,1039.78 ; v1(601.99,1162.25) 601.99,1092.81 cw(c512.76,1092.81) 584.52,1039.78
B9: P3.13 U1.140 | length 1629.7
  Top Layer w6: U1.140@506.25,1578.31 506.25,1473.89 ccw(c606.25,1473.89) 535.54,1403.18 555.7,1383.02 cw(c484.99,1312.31) 584.99,1312.31 v1(584.99,1196.25)
  Bottom Layer w6: 568.11,1040.34 ccw(c498.53,1091.67) 568.19,1040.45 ; v1(584.99,1196.25) 584.99,1091.67 cw(c498.53,1091.67) 568.19,1040.45 ; P3.13@734,70 730.99,73.01 730.99,129.45 ccw(c701.34,129.45) 722.31,150.42 cw(c751.92,180.03) 710.52,173.71 cw(c751.92,180.03) 710.04,180.03 710.04,290.9 ccw(c610.04,290.9) 680.75,361.61 538,504.37 cw(c579.05,545.42) 520.99,545.42 520.99,951.83 cw(c620.99,951.83) 550.28,1022.54 568.19,1040.45
B10: P1.16 U1.69 | length 809.6
  Top Layer w6: v1(1057.43,621.69) U1.69@1057.43,741.69
  Bottom Layer w6: v1(1057.43,621.69) 1626.43,621.69 1659.86,625.12 P1.16@1746.43,634
B11: P1.15 U1.70 | length 969.2
  Top Layer w6: v1(1077.12,601.97) U1.70@1077.12,741.69
  Bottom Layer w6: v1(1077.12,601.97) 1767.49,601.97 ccw(c1767.49,681.45) 1787.79,604.61 ccw(c1767.49,681.45) 1823.69,625.25 cw(c1844.81,604.13) 1844.81,634 P1.15@1898,634
B12: P3.28 U1.73 | length 603.9
  Top Layer w6: v1(1198.52,569.97) U1.73@1198.52,815.97
  Bottom Layer w6: v1(1198.52,569.97) 1198.52,370.31 ccw(c1253.2,370.31) 1214.54,331.65 cw(c1167.54,284.65) 1234,284.65 P3.28@1234,221.57
B13: P3.3 U1.74 | length 827.3
  Top Layer w6: v1(1178.52,584.97) 1178.52,744.21 ccw(c1126.11,744.21) 1163.17,781.27 1160.85,783.59 ccw(c1102.06,739.55) 1154,791.49 cw(c1174.49,811.97) 1145.52,811.97 1145.52,817.97 cw(c1162.74,817.97) 1162.74,835.2 U1.74@1190.31,835.2
  Bottom Layer w6: v1(1178.52,584.97) 1178.52,373.36 ccw(c1233.25,373.36) 1194.55,334.66 cw(c1157.16,297.27) 1210.04,297.27 1210.04,148.26 ccw(c1291.85,148.26) 1234,90.42 P3.3@1234,70
B14: Led1.2 P3.27 U1.75 | length 1071.7
  Top Layer w6: Led1.2@1007.69,174.69 1007.69,345.25 cw(c1107.69,345.25) 1107.69,445.25 v1(1158.52,445.25) ; v1(1158.52,569.97) 1158.52,744.42 ccw(c1120.96,744.42) 1147.52,770.97 cw(c1188.56,812.01) 1130.52,812.01 1130.52,821.97 cw(c1163.43,821.97) 1163.43,854.88 U1.75@1190.31,854.88
  Bottom Layer w6: v1(1158.52,569.97) v1(1158.52,445.25) 1158.52,372.53 ccw(c1203.94,372.53) 1171.82,340.42 cw(c1142.42,311.02) 1184,311.02 P3.27@1184,221.57
B15: P3.2 U1.76 | length 882
  Top Layer w6: U1.76@1190.31,874.57 1230.92,874.57 cw(c1230.92,855.97) 1249.52,855.97 1249.52,846.01 cw(c1191.48,846.01) 1232.52,804.97 ccw(c1266.32,771.17) 1218.52,771.17 v1(1218.52,584.01)
  Bottom Layer w6: v1(1218.52,584.01) 1218.52,376.09 ccw(c1291.98,376.09) 1240,324.18 ; 1240.04,324.15 1242.76,321.42 ; 1242.8,321.38 cw(c1201.06,279.71) 1260.04,279.71 1260.04,152.26 ccw(c1341.85,152.26) 1284,94.42 P3.2@1284,70
Boot0: P3.12 R2.2 U1.138 | length 1869.7
  Top Layer w6: R2.2@516,1798.44 516.33,1798.11 cw(c445.62,1727.4) 545.62,1727.4 U1.138@545.62,1578.31 545.62,1492.52 ccw(c645.62,1492.52) 574.91,1421.81 589.7,1407.02 cw(c518.99,1336.31) 618.99,1336.31 v1(618.99,1195.25)
  Bottom Layer w6: 600.58,1038.81 ccw(c535.26,1091.2) 600.69,1038.95 ; v1(618.99,1195.25) 618.99,1091.2 cw(c535.26,1091.2) 600.69,1038.95 ; P3.12@784,70 784,119.19 ccw(c744.08,119.19) 778.99,138.55 ccw(c744.08,119.19) 772.31,147.42 cw(c801.92,177.03) 760.14,174.08 cw(c801.92,177.03) 760.04,177.03 760.04,274.84 ccw(c660.04,274.84) 730.75,345.55 563.89,512.42 cw(c609.5,558.03) 544.99,558.03 544.99,941.83 cw(c644.99,941.83) 574.28,1012.54 600.69,1038.95
C0: P2.7 U1.26 | length 144.4
  Top Layer w6: v1(294.64,1012.36) U1.26@353.69,1012.36
  Bottom Layer w6: P2.7@221.6,1034 ccw(c243.24,1034) 243.24,1012.36 v1(294.64,1012.36)
C1: P2.8 U1.27 | length 98.4
  Top Layer w6: v1(255.27,992.68) U1.27@353.69,992.68
C2: P2.9 U1.28 | length 120.9
  Top Layer w6: v1(255.27,933.62) cw(c294.64,933.62) 294.64,972.99 U1.28@353.69,972.99
C3: P2.21 U1.29 | length 301.4
  Top Layer w6: v1(71.69,883.25) cw(c97.66,857.28) 97.66,894.01 217.31,894.01 ccw(c217.31,985.06) 281.68,920.67 286.48,925.47 cw(c353.69,858.26) U1.29@353.69,953.31
C4: P3.22 U1.44 | length 654.7
  Top Layer w6: U1.44@565.31,741.69 565.31,668.91 v1(640.54,593.67)
  Bottom Layer w6: v1(640.54,593.67) 904.71,329.51 cw(c834,258.8) 934,258.8 P3.22@934,235.42
C5: P3.8 U1.45 | length 828.5
  Top Layer w6: U1.45@584.99,741.69 584.99,673.27 v1(663.73,594.53)
  Bottom Layer w6: v1(663.73,594.53) 730.48,527.78 ccw(c744.57,527.78) 734.6,517.83 930.75,321.68 cw(c860.04,250.96) 960.04,250.96 960.04,178.45 ccw(c1005.34,178.45) 960.26,173.97 ccw(c1005.34,178.45) 973.31,146.42 cw(c947.49,120.6) 984,120.6 P3.8@984,70
C6: P4.28 U1.96 | length 757.9
  Top Layer w6: U1.96@1190.31,1268.27 1266.43,1268.27 ccw(c1266.43,1309.21) 1307.38,1309.21 1307.38,1582.42 ccw(c1252.73,1582.42) 1291.37,1621.06 1287.01,1625.42 cw(c1336.83,1675.23) 1266.38,1675.23 1266.38,1866.36 ccw(c1235.38,1866.36) v1@1235.38,1897.36
  other v1: 1234,1897.97
C7: P4.3 U1.97 | length 568.6
  Top Layer w6: U1.97@1190.31,1287.95 1261.97,1287.95 ccw(c1261.97,1321.36) 1295.38,1321.36 1295.38,1575.42 ccw(c1235.83,1575.42) 1277.96,1617.5 1261.31,1634.15 cw(c1323.91,1696.75) 1235.38,1696.75 v1@1235.38,1747.36
  other v1: 1234,1746.4
C8: P4.27 U1.98 | length 701.6
  Top Layer w6: v1@1187.38,1897.36 cw(c1187.38,1879.36) 1205.38,1879.36 1205.38,1714.53 ccw(c1305.38,1714.53) 1234.67,1643.82 1259.79,1618.7 cw(c1200.5,1559.42) 1283.38,1572.11 1283.38,1345.36 cw(c1245.65,1345.36) 1245.65,1307.64 U1.98@1190.31,1307.64
  other v1: 1184,1897.97
C9: P4.4 U1.99 | length 511.4
  Top Layer w6: v1(1184,1746.4) 1184,1705.95 ccw(c1252.63,1705.95) 1204.08,1657.44 ; U1.99@1190.31,1327.32 1229.34,1327.32 ccw(c1229.34,1369.36) 1271.38,1369.36 1271.38,1550.11 ccw(c1171.38,1550.11) 1251.3,1610.22 1204.1,1657.42
C10: P4.25 U1.111 | length 331.1
  Top Layer w6: U1.111@1077.12,1578.31 1077.12,1650.88 cw(c1121.1,1650.88) 1090,1681.97 ccw(c1061.03,1710.95) 1102,1710.95 1102,1854.52 ccw(c1040.54,1854.52) v1(1084,1897.97)
C11: P4.6 U1.112 | length 175.2
  Top Layer w6: U1.112@1057.43,1578.31 1057.43,1667.29 cw(c1086.68,1667.29) 1066,1687.97 ccw(c1022.54,1731.43) 1084,1731.43 v1(1084,1746.4)
C12: P4.24 U1.113 | length 345.5
  Top Layer w6: v1(1034,1897.97) cw(c1034,1865.97) 1066,1865.97 1066,1734.95 cw(c1025.03,1734.95) 1054,1705.97 ccw(c1093.24,1666.74) 1037.75,1666.74 U1.113@1037.75,1578.31
C13: P2.13 U1.7 | length 875.9
  Top Layer w6: U1.7@353.69,1386.38 388.68,1386.38 cw(c388.68,1367.86) 401.76,1380.96 436.7,1346.02 cw(c365.99,1275.31) 465.99,1275.31 v1(465.99,1162.25)
  Bottom Layer w6: P2.13@221.6,734 295.02,734 ccw(c295.02,834) 365.73,763.29 411.04,808.6 ccw(c348.39,871.25) 436.99,871.25 436.99,1011.65 cw(c477.08,1011.65) 448.73,1039.99 455.23,1046.49 ccw(c429.26,1072.47) 465.99,1072.47 v1(465.99,1162.25)
D0: P4.7 U1.114 U3.9 | length 999.7
  Top Layer w6: v1(1018.06,1397.97) U1.114@1018.06,1578.31 1018.06,1685.64 cw(c1038.33,1685.64) 1024,1699.97 ccw(c999.86,1724.12) 1034,1724.12 v1(1034,1746.4) ; v1(1403.38,1214.36) 1403.38,1126.22 ccw(c1426.68,1126.22) 1426.68,1102.91 U3.9@1436.37,1102.91
  Bottom Layer w6: v1@1018.52,1397.97 ccw(c1019.62,1396.87) 1018.06,1396.87 1018.06,1379.97 ccw(c1074.62,1379.97) 1074.62,1323.42 1328.32,1323.42 cw(c1328.32,1248.36) 1403.38,1248.36 v1(1403.38,1214.36)
D1: P4.23 U1.115 U3.10 | length 1198.7
  Top Layer w6: v1(984,1897.97) cw(c926.61,1840.58) 1007.77,1840.58 1007.77,1710.25 cw(c1001.72,1710.25) 1006,1705.97 ccw(c1024.4,1687.57) 998.38,1687.57 U1.115@998.38,1578.31 v1(998.38,1379.97) ; v1(1386.38,1231.36) 1386.38,1121.41 ccw(c1436.37,1121.41) U3.10@1436.37,1071.42
  Bottom Layer w6: v1(998.38,1379.97) 998.38,1355.56 ccw(c1048.52,1355.56) 1048.52,1305.42 1312.32,1305.42 cw(c1312.32,1231.36) v1(1386.38,1231.36)
D2: P4.8 U1.116 | length 169.5
  Top Layer w6: U1.116@978.69,1578.31 978.69,1733.59 cw(c996.81,1733.59) v1(984,1746.4)
D3: P4.22 U1.117 | length 326.4
  Top Layer w6: v1(934,1897.97) cw(c873.63,1837.6) 959.01,1837.6 U1.117@959.01,1578.31
D4: P4.9 U1.118 U3.41 | length 1340.8
  Top Layer w6: v1(934,1746.4) cw(c921.15,1733.55) 939.32,1733.55 U1.118@939.32,1578.31 v1(939.32,1538.94) ; v1(1640.05,1372.43) 1640.05,1336.22 ccw(c1715.87,1336.22) 1655.84,1289.9 ccw(c1715.87,1336.22) 1715.87,1260.39 U3.41@1876.37,1260.39
  Bottom Layer w6: v1(939.32,1538.94) 948.24,1530.02 ccw(c958,1539.77) 958,1525.97 1540.05,1525.97 cw(c1540.05,1425.97) 1640.05,1425.97 v1(1640.05,1372.43)
D5: P1.22 U1.119 U3.17 | length 1562.8
  Top Layer w6: v1(919.64,1391.97) U1.119@919.64,1578.31 ; v1(1369.38,1214.36) v1(1376.31,1011.42) ; U3.17@1436.37,850.95 v1(1472.15,850.95) 1472.15,1017.26 v1(1472.31,1017.42)
  Bottom Layer w6: v1(919.64,1391.97) 919.64,1327.42 ccw(c1019.64,1327.42) 1019.64,1227.42 1337.86,1227.42 cw(c1337.86,1182.84) v1(1369.38,1214.36) ; v1(1376.31,1011.42) v1(1472.31,1017.42) ; v1(1472.15,850.95) 1485.44,850.95 ccw(c1485.44,950.95) 1556.16,880.23 1580.63,904.71 cw(c1651.34,834) 1651.34,934 P1.22@1746.43,934
D6: P4.21 U1.122 | length 346.6
  Top Layer w6: U1.122@860.58,1578.31 860.58,1591.14 cw(c960.58,1591.14) 889.87,1661.85 ccw(c841.28,1710.44) 910,1710.44 910,1873.97 ccw(c886,1873.97) v1(886,1897.97)
D7: P4.10 U1.123 | length 179.6
  Top Layer w6: U1.123@840.9,1578.31 840.9,1598.54 cw(c933.43,1598.54) 868,1663.97 ccw(c829.37,1702.6) 884,1702.6 v1(884,1746.4)
D8: P1.25 U1.77 U3.36 | length 1034.7
  Top Layer w6: U1.77@1190.31,894.25 1190.31,894.92 v1(1259.2,894.92) ; v1(1671.65,1102.91) U3.36@1876.37,1102.91
  Bottom Layer w6: v1(1259.2,894.92) 1515.11,894.92 ccw(c1515.11,963.81) 1584.01,963.81 1584.01,1006.91 ; v1(1671.65,1102.91) 1670.01,1102.91 ccw(c1670.01,1016.91) 1584.01,1016.91 1584.01,1006.91 ; v1(1746.43,1084) 1661.09,1084 ccw(c1661.09,1006.91) 1584.01,1006.91
D9: P1.5 U1.78 U3.37 | length 893.2
  Top Layer w6: U1.78@1190.31,913.94 1190.31,914.6 v1(1239.52,914.6) ; v1(1671.65,1134.41) U3.37@1876.37,1134.41 1876.37,1134 v1(1923,1134)
  Bottom Layer w6: v1(1239.52,914.6) 1513.94,914.6 ccw(c1513.94,974.97) 1571.62,957.15 1571.62,1048.41 cw(c1657.62,1048.41) 1657.62,1134.41 v1(1671.65,1134.41)
D10: P1.26 U1.79 U3.38 | length 937.5
  Top Layer w6: U1.79@1190.31,933.62 1190.31,934.29 v1(1259.2,934.29) ; v1(1671.65,1165.91) U3.38@1876.37,1165.91
  Bottom Layer w6: v1(1259.2,934.29) 1500.62,934.29 ccw(c1500.62,992.97) 1559.31,992.97 1559.31,1079.91 cw(c1645.31,1079.91) 1645.31,1165.91 v1(1671.65,1165.91) P1.26@1746.43,1134
D11: P3.29 U1.80 U3.18 | length 1171.4
  Top Layer w6: U1.80@1190.31,953.31 1190.31,953.97 v1(1239.52,953.97) ; v1(1390.52,581.97) 1390.52,773.97 cw(c1436,773.97) 1436,819.45 U3.18@1436.37,819.45 1448.35,819.45 ccw(c1448.35,900.4) 1529.31,900.4 ccw(c1476.73,900.4) 1513.91,937.58 v1(1497.52,953.97)
  Bottom Layer w6: v1(1239.52,953.97) v1(1497.52,953.97) ; P3.29@1284,221.57 1284,272.56 cw(c1384,272.56) 1313.29,343.27 1362.34,392.32 ccw(c1294.29,460.36) 1390.52,460.36 v1(1390.52,581.97)
D12: P1.14 U1.81 U3.23 | length 966.5
  Top Layer w6: U1.81@1191.33,971.97 cw(c1191.33,972.99) U1.81@1190.31,972.99 1190.31,973.66 v1(1259.2,973.66) ; v1(1520.31,973.66) 1542.43,938 1542.43,854 1550.78,815.58 v1(1572.43,716) ; v1(1662.05,680.43) 1844.91,680.43 ccw(c1844.91,724.93) U3.23@1876.37,693.46 ccw(c1899.22,716.31) 1899.22,684 v1(1923,684)
  Bottom Layer w6: v1(1259.2,973.66) v1(1520.31,973.66) ; v1(1572.43,716) 1578.7,709.72 ccw(c1649.41,780.43) 1649.41,680.43 v1(1662.05,680.43)
D13: P1.20 U1.82 U3.28 | length 804.8
  Top Layer w6: U1.82@1190.31,992.68 1190.31,993.34 v1(1239.52,993.34) ; v1(1496.31,993.34) 1511.69,993.34 cw(c1511.69,936.73) 1568.31,936.73 v1(1568.31,850.95) ; v1(1743.79,850.95) U3.28@1876.37,850.95
  Bottom Layer w6: v1(1239.52,993.34) v1(1496.31,993.34) ; v1(1568.31,850.95) v1(1743.79,850.95)
D14: P1.24 U1.85 U3.7 | length 729.8
  Top Layer w6: U1.85@1190.31,1051.73 v1(1256.31,1051.73) ; U3.7@1436.37,1165.91 cw(c1436.37,1067.76) 1534.52,1067.76 v1(1534.52,1049.97) v1(1665.37,1034)
  Bottom Layer w6: v1(1256.31,1051.73) 1258.07,1049.97 v1(1534.52,1049.97) ; v1(1665.37,1034) P1.24@1746.43,1034
D15: P1.23 U1.86 U3.8 | length 669.3
  Top Layer w6: U1.86@1190.31,1071.42 v1(1238.31,1071.42) ; v1(1434.32,1132.36) U3.8@1436.37,1134.41 1444.08,1134.41 cw(c1444.08,1079.97) 1498.52,1079.97 1498.52,1067.97 ccw(c1552.52,1067.97) 1552.52,1013.97 v1(1624.52,1013.97)
  Bottom Layer w6: v1(1238.31,1071.42) 1373.38,1071.42 ccw(c1373.38,1132.36) v1(1434.32,1132.36) ; v1(1624.52,1013.97) P1.23@1746.43,984
E0: P1.4 U1.141 U3.39 | length 1718.8
  Top Layer w6: v1(486.57,1558.62) U1.141@486.57,1578.31 ; v1(1600.68,1418.75) 1600.68,1297.4 ccw(c1700.68,1297.4) 1700.68,1197.4 U3.39@1876.37,1197.4 1890.65,1197.4 cw(c1890.65,1151.65) v1(1923,1184)
  Bottom Layer w6: v1(486.57,1558.62) 486.57,1538.94 ccw(c546.83,1599.2) 546.83,1513.97 1505.45,1513.97 cw(c1505.45,1418.75) v1(1600.68,1418.75)
E1: P1.27 U1.142 U3.40 | length 1725.7
  Top Layer w6: v1(466.88,1519.25) U1.142@466.88,1578.31 ; v1(1620.36,1340.01) 1620.36,1328.9 ccw(c1720.36,1328.9) 1720.36,1228.9 U3.40@1876.37,1228.9
  Bottom Layer w6: v1(466.88,1519.25) ccw(c508.59,1560.96) 508.59,1501.97 1446.67,1501.97 cw(c1446.67,1401.97) 1517.39,1472.69 1599.36,1390.71 ; 1599.37,1390.7 cw(c1548.66,1340.01) v1(1620.36,1340.01) ; v1(1671.65,1240.91) ccw(c1728.56,1240.91) 1728.56,1184 P1.27@1746.43,1184
E2: P3.17 U1.1 | length 1485.7
  Top Layer w6: U1.1@353.69,1502.25 U1.1@353.69,1504.49 382.61,1504.49 cw(c382.61,1425.72) 398.29,1502.91 cw(c382.61,1425.72) 438.31,1481.42 538.7,1381.02 cw(c467.99,1310.31) 567.99,1310.31 v1(567.99,1162.25)
  Bottom Layer w6: 526.95,498.44 cw(c570.39,541.83) 508.99,541.83 508.99,958.2 cw(c608.99,958.2) 529.15,1018.41 ; 526.97,498.42 654.71,370.68 cw(c584,299.97) 684,299.97 P3.17@684,221.57 ; 529.24,1018.53 ccw(c608.99,958.2) 529.15,1018.41 ; 551.64,1040.87 ccw(c495.66,1086.68) 551.77,1041.03 ; v1(567.99,1162.25) 567.99,1086.68 cw(c495.66,1086.68) 551.77,1041.03 ; 529.15,1018.41 551.77,1041.03
E3: P3.14 U1.2 | length 1604.3
  Top Layer w6: U1.2@353.69,1484.8 392.31,1484.8 cw(c392.31,1459.18) 410.43,1477.3 522.31,1365.42 cw(c453.06,1296.17) 550.99,1296.17 v1(550.99,1196.25)
  Bottom Layer w6: 533.76,1039.99 ccw(c472.1,1089.21) 533.88,1040.14 ; v1(550.99,1196.25) 550.99,1089.21 cw(c472.1,1089.21) 533.88,1040.14 ; P3.14@684,70 684,122.77 ccw(c640.66,122.77) 671.31,153.42 cw(c698.51,180.62) 660.7,173.53 cw(c698.51,180.62) 660.04,180.62 660.04,306.96 ccw(c560.04,306.96) 630.75,377.67 514,494.42 cw(c555.07,535.49) 496.99,535.49 496.99,981.8 cw(c548.77,981.8) 512.14,1018.4 533.88,1040.14
E4: P3.16 U1.3 | length 1410.6
  Top Layer w6: U1.3@353.69,1465.12 389.31,1465.12 cw(c389.31,1437.84) 408.6,1457.13 504.7,1361.02 cw(c433.99,1290.31) 533.99,1290.31 v1(533.99,1162.25)
  Bottom Layer w6: 496.11,1019.4 ccw(c546.64,984.09) 496.04,1019.3 ; 518.07,1041.3 ccw(c465.53,1085.19) 518.22,1041.48 ; v1(533.99,1162.25) 533.99,1085.19 cw(c465.53,1085.19) 518.22,1041.48 ; P3.16@634,221.57 634,316.03 ccw(c534,316.03) 604.71,386.74 502.03,489.42 cw(c543.17,530.56) 484.99,530.56 484.99,984.09 cw(c546.64,984.09) 496.04,1019.3 ; 496.04,1019.3 518.22,1041.48
E5: P3.15 U1.4 | length 1530.4
  Top Layer w6: U1.4@353.69,1445.43 383.31,1445.43 cw(c383.31,1418.91) 402.06,1437.67 487.7,1352.02 cw(c416.99,1281.31) 516.99,1281.31 v1(516.99,1196.25)
  Bottom Layer w6: 503.47,1043.7 ccw(c451.97,1083.39) 503.57,1043.83 ; v1(516.99,1196.25) 516.99,1083.39 cw(c451.97,1083.39) 503.57,1043.83 ; P3.15@634,70 634,118.7 ccw(c573.59,118.7) 616.31,161.42 cw(c643.62,188.73) 605.92,180.33 cw(c643.62,188.73) 604.99,188.73 604.99,328.07 ccw(c504.99,328.07) 575.7,398.78 492.74,481.74 cw(c540.42,529.42) 472.99,529.42 472.99,993.82 cw(c519.9,993.82) 486.73,1026.99 503.57,1043.83
E6: P2.14 U1.5 | length 989.3
  Top Layer w6: U1.5@353.69,1425.75 371.31,1425.75 cw(c371.31,1365.39) 413.98,1408.07 470.7,1351.35 cw(c399.99,1280.64) 499.99,1280.64 v1(499.99,1162.25)
  Bottom Layer w6: P2.14@221.6,684 293.02,684 ccw(c293.02,784) 363.73,713.29 431.7,781.26 ccw(c360.99,851.97) 460.99,851.97 460.99,1000.94 cw(c502.78,1000.94) 473.23,1030.49 488.11,1045.37 ; 488.01,1045.24 ccw(c443.22,1080.12) 488.11,1045.37 ; v1(499.99,1162.25) 499.99,1080.12 cw(c443.22,1080.12) 488.11,1045.37
E7: P3.25 U1.58 U3.13 | length 1475.7
  Top Layer w6: v1(840.9,508.49) U1.58@840.9,741.69 840.9,919.97 cw(c940.9,919.97) 940.9,1019.97 v1(1056.15,1019.97) ; v1(1347.52,1019.97) ccw(c1390.56,1019.97) 1390.56,976.93 U3.13@1436.37,976.93 U3.13@1433.37,973.93
  Bottom Layer w6: v1(840.9,508.49) 1055.31,294.08 cw(c986.04,224.81) 1084,224.81 P3.25@1084,221.57 ; v1(1056.15,1019.97) v1@1347,1019.97